# Altium PCB USBHub.PcbDoc
Units mm, origin at the board's own origin, x right, y up, seen from the top; angles counter-clockwise.
Board outline 68.78 x 107.13 mm, 2 copper layers (Top Layer, Bottom Layer), stack 1.071 mm thick; 66 components, 50 nets, 264 pads, 94 vias.
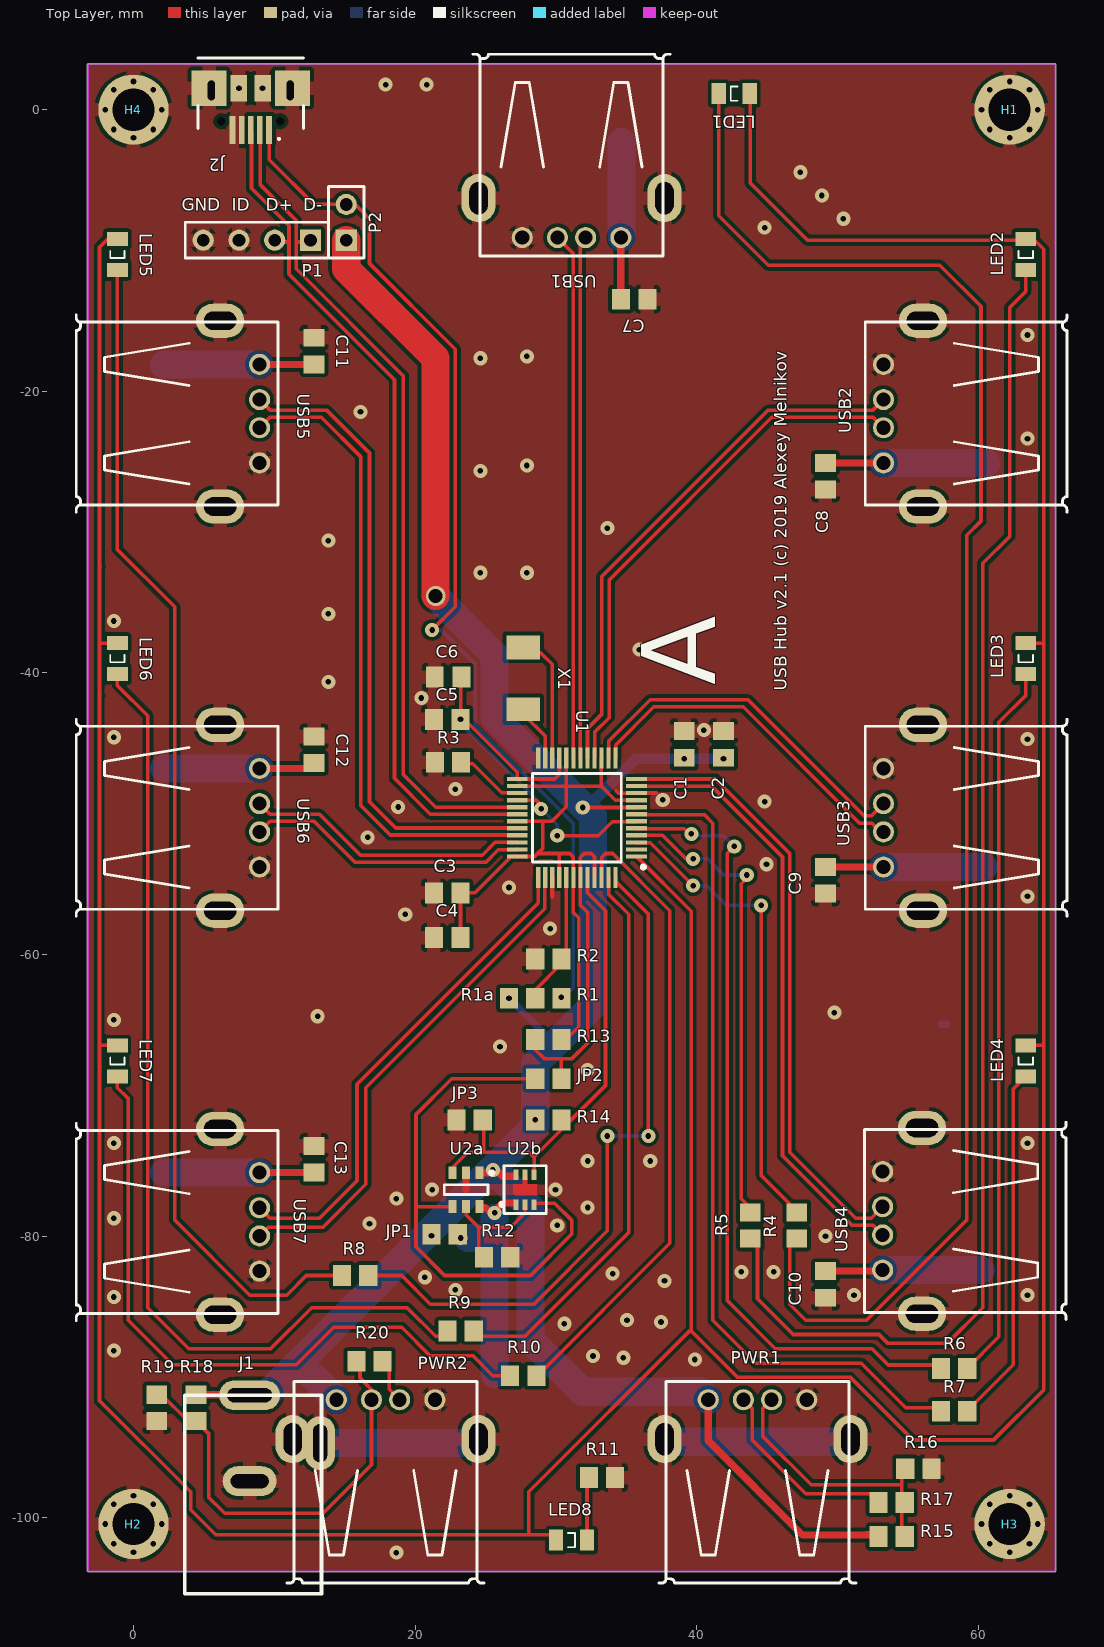
[diagram p0: Top Layer view]
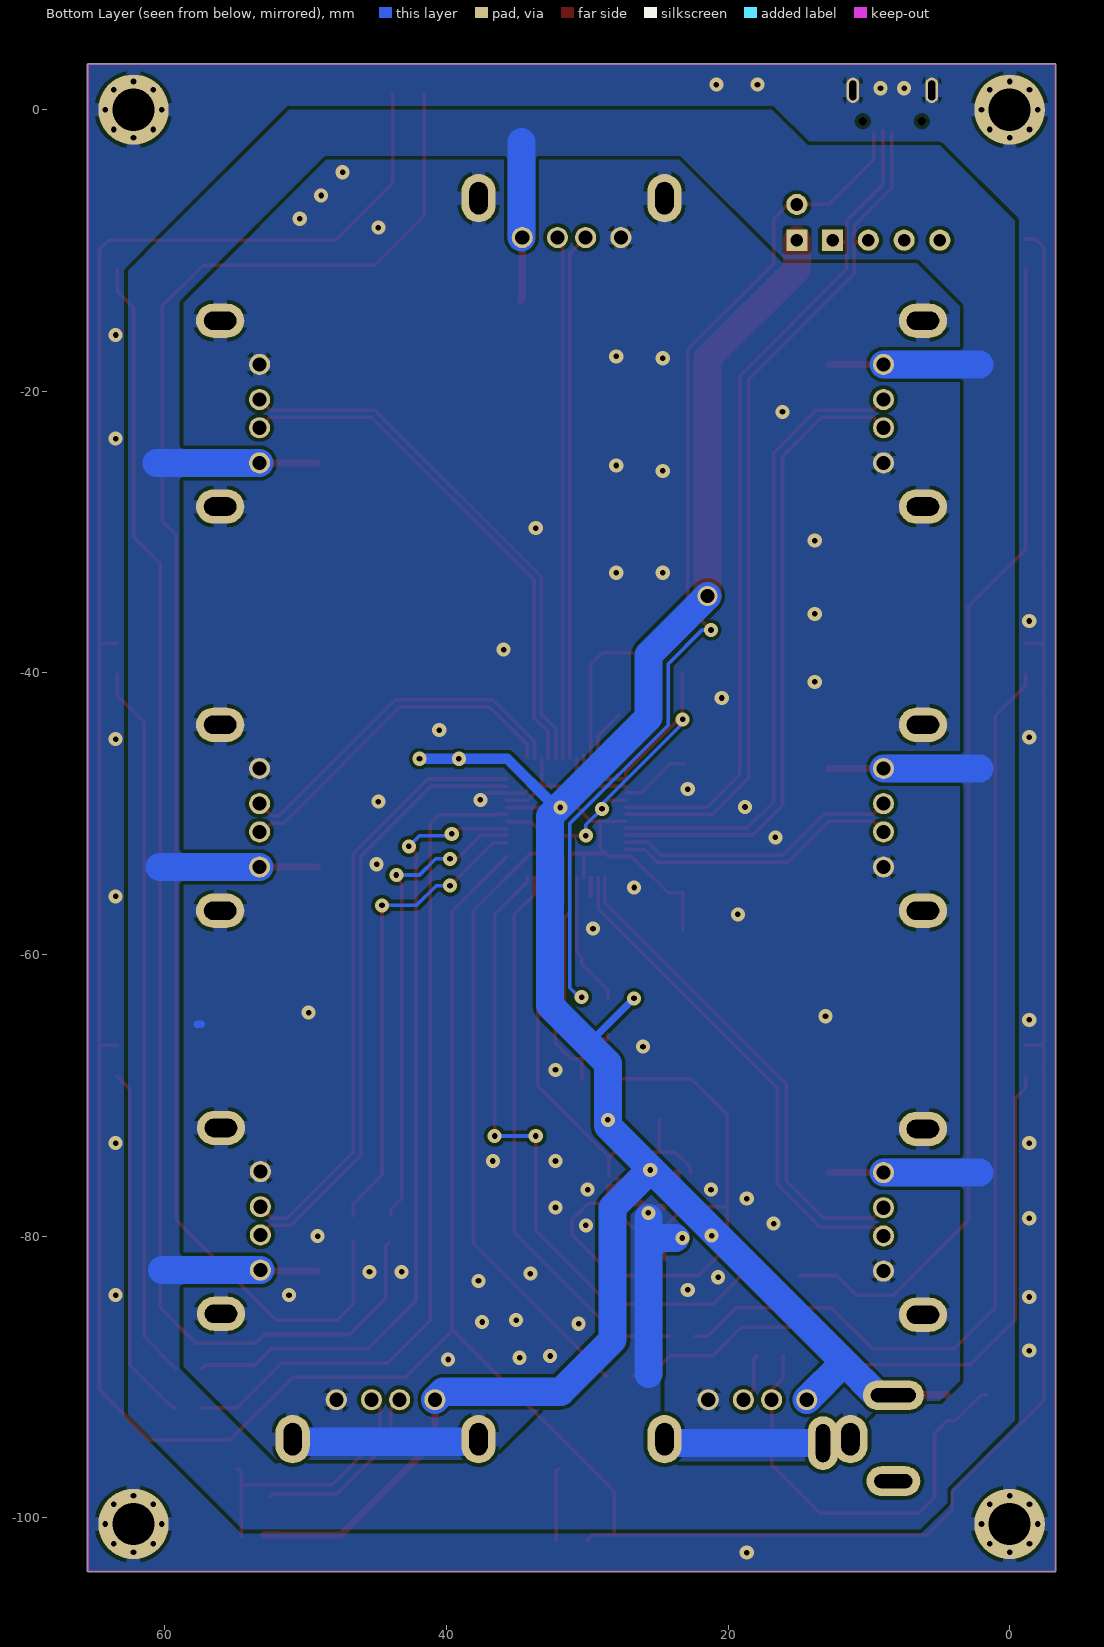
[diagram p1: Bottom Layer view, seen from below]
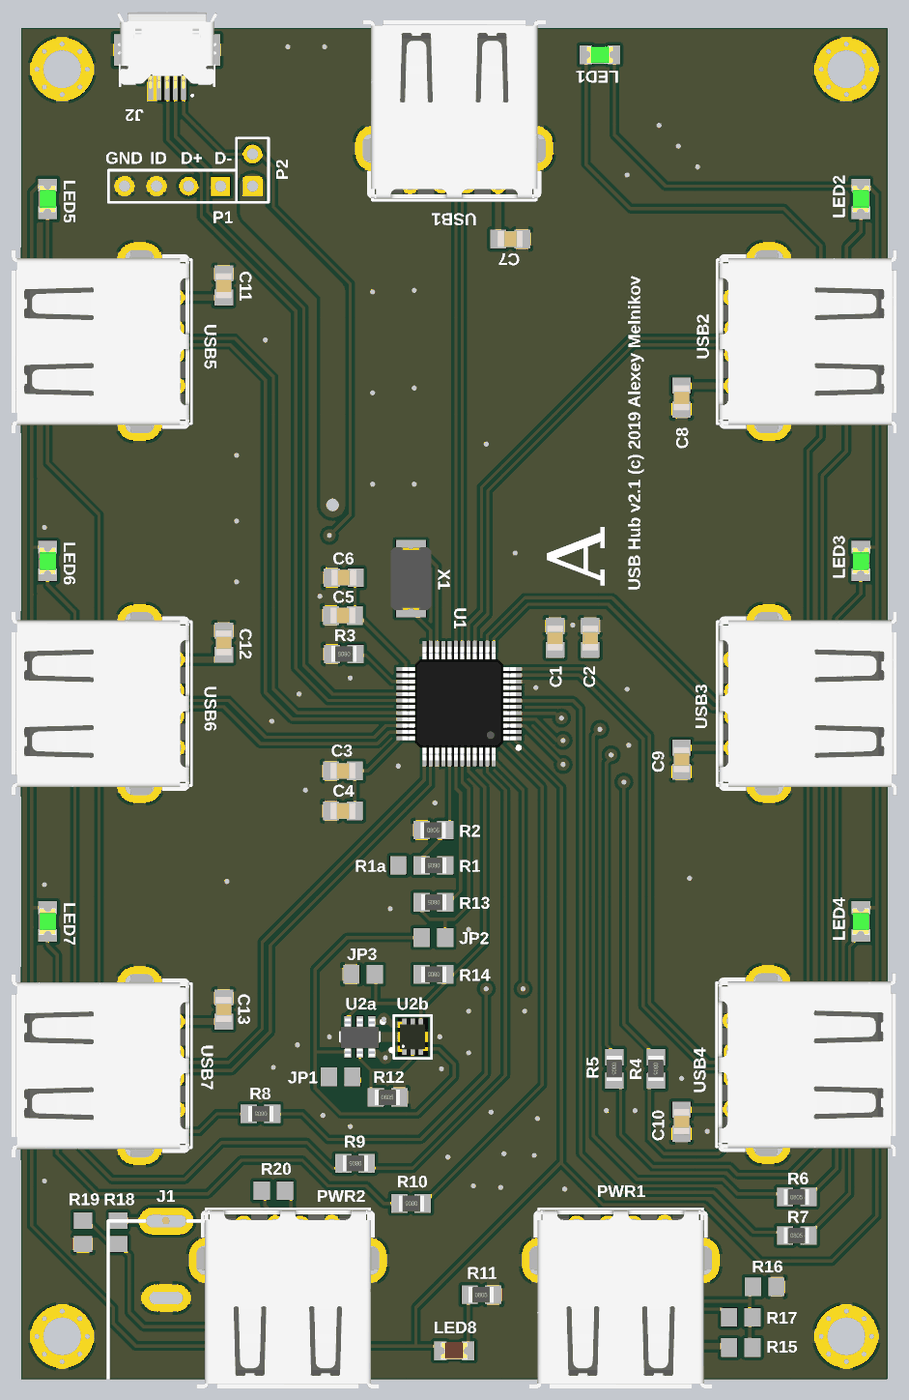
[diagram p2: 3D render of the assembled board from above, using the file's embedded part models]

## Layer stack, top to bottom
Top Solder: solder mask 0.0102, Solder Resist, Dk 3.5
Top Layer: signal copper 0.0356
Dielectric 1: dielectric 1, FR-4, Dk 4.8
Bottom Layer: signal copper 0.0356
Bottom Solder: solder mask 0.0102, Solder Resist, Dk 3.5

## Board outline
-3.275,-103.759 ccw(c-3.175,-103.759) -3.175,-103.859 65.405,-103.859 ccw(c65.405,-103.759) 65.505,-103.759 65.505,3.175 ccw(c65.405,3.175) 65.405,3.275 -3.175,3.275 ccw(c-3.175,3.175) -3.275,3.175

## Design rules (kind name [scope] priority, off if disabled: settings)
BoardOutlineClearance [All] p1: gap=0 ignorepadtopadclearanceinfootprint=FALSE
Clearance keep-out_clearance [InNamedPolygon('ground') vs OnLayer('Keep-Out Layer')] p1: gap=0 ignorepadtopadclearanceinfootprint=FALSE
Clearance [(InComponent('U1') OR InComponent('U2'))] p2: gap=0.2 ignorepadtopadclearanceinfootprint=TRUE except(0: Arc-Hole Track-Hole SMDPad-Hole THPad-Hole Via-Hole Fill-Hole Poly-Hole Region-Hole Text-Hole)
Clearance Clearance_1 [All] p3: gap=0.254 ignorepadtopadclearanceinfootprint=TRUE except(0: Arc-Hole Track-Hole SMDPad-Hole THPad-Hole Via-Hole Fill-Hole Poly-Hole Region-Hole Text-Hole; 0.1: Arc-Arc Arc-Track Arc-SMDPad Track-Track Track-SMDPad)
ComponentClearance [All] p1 off: gap=0.254 collisioncheckmode=3 verticalgap=0.254 showdistances=FALSE
Height [All] p1 off: minheight=0 maxheight=25.4 prefheight=12.7
HoleSize [All] p1: absolutevalues=TRUE maxlimit=6 minlimit=0.025 maxpercent=80.000 minpercent=20.000
MinimumSolderMaskSliver [InComponent('U*')] p1: minsoldermaskwidth=0.2
MinimumSolderMaskSliver MinimumSolderMaskSliver_1 [All] p2: minsoldermaskwidth=0.25
PolygonConnect PolygonConnect_1 [InNet('NetFB*')] p1: connectstyle=Direct reliefconductorwidth=0.762 reliefentries=4 polygonreliefangle="90 Angle" airgapwidth=0.254
PolygonConnect PolygonConnect_2 [IsVia] p2: connectstyle=Direct reliefconductorwidth=0.762 reliefentries=4 polygonreliefangle="90 Angle" airgapwidth=0.254
PolygonConnect [not IsVia] p3: connectstyle=Relief reliefconductorwidth=1 reliefentries=4 polygonreliefangle="90 Angle" airgapwidth=0.254
RoutingVias [All] p1: holewidth=0.4 width=1 viastyle="Through Hole" minholewidth=0.4 minwidth=0.9 maxholewidth=0.4 maxwidth=1
SilkToSolderMaskClearance [IsPad] p1 off: minsilkscreentomaskgap=0.127 clearancetoexposedcopper=TRUE
SolderMaskExpansion SolderMaskExpansion_U1 [InComponent('U1')] p1: expansion=0
SolderMaskExpansion [All] p2: expansion=0.051
Width Width_power [InNetClass('power')] p1: maxlimit=2 minlimit=0.254 preferedwidth=0.508 minimp=50.000000 maximp=50.000000 favimp=50.000000
Width Width_signal [All] p2: maxlimit=2 minlimit=0.254 preferedwidth=0.254 minimp=50.000000 maximp=50.000000 favimp=50.000000
25 further rules are at their usual default settings.

## Classes and differential pairs
net class power: GND VCC

## Components (designator, comment, footprint, x,y, rotation, side; value= is the part's Value field where it differs from the comment)
C1 "C0805" C0805 39.116,-45.085 r90 top value=10uF
C2 "C0805" C0805 41.91,-45.085 r90 top value=0.1uF
C3 "C0805" C0805 22.281,-55.626 r180 top value=10uF
C4 "C0805" C0805 22.281,-58.801 r180 top value=0.1uF
C5 "C0805" C0805 22.281,-43.307 r180 top value=0.1uF
C6 "C0805" C0805 22.346,-40.306 r180 top value=10uF
C7 "C0805" C0805 35.56,-13.462 r0 top value=10uF
C8 "C0805" C0805 49.149,-26.035 r270 top value=10uF
C9 "C0805" C0805 49.149,-54.737 r270 top value=10uF
C10 "C0805" C0805 49.149,-83.439 r270 top value=10uF
C11 "C0805" C0805 12.827,-17.145 r90 top value=10uF
C12 "C0805" C0805 12.827,-45.466 r90 top value=10uF
C13 "C0805" C0805 12.827,-74.549 r90 top value=10uF
H1 "M3" M3#1 62.23,0 r180 top locked
H2 "M3" M3#1 0,-100.457 r180 top locked
H3 "M3" M3#1 62.23,-100.457 r180 top locked
H4 "M3" M3#2 0,0 r270 top locked
J1 "*" "PWR-2mm - DNI" 8.255,-91.309 r0 top locked
J2 "MicroUSB SMT" "MicroUSB SMT v2" 8.33,3.674 r0 top locked
JP1 "0" "R0805 - DNI" 22.098,-79.883 r180 top
JP2 "0" "R0805 - DNI" 29.464,-68.834 r180 top
JP3 "0" "R0805 - DNI" 23.876,-71.755 r180 top
LED1 "Green" LEDG0805 42.672,1.143 r180 top
LED2 "Green" LEDG0805 63.373,-10.287 r270 top
LED3 "Green" LEDG0805 63.373,-38.989 r270 top
LED4 "Green" LEDG0805 63.373,-67.564 r270 top
LED5 "Green" LEDG0805 -1.143,-10.287 r270 top
LED6 "Green" LEDG0805 -1.143,-38.989 r270 top
LED7 "Green" LEDG0805 -1.143,-67.564 r270 top
LED8 "Red" LEDR0805 31.115,-101.6 r0 top
P1 "USB IN" HDR1X4 12.573,-9.271 r180 top
P2 "Header 2" HDR1X2 15.113,-9.271 r90 top
PWR1 "USBA-PTH" USB-A-F-PTH 44.323,-97.028 r0 top locked
PWR2 "USBA-PTH" USB-A-F-PTH 17.907,-97.028 r0 top locked
R1 "47K" R0805 29.464,-63.119 r180 top
R1a "47K" "R0805 - DNI" 27.604,-63.119 r0 top
R2 "100K" R0805 29.464,-60.325 r0 top
R3 "2.7K" R0805 22.346,-46.355 r180 top
R4 "510" R0805 47.117,-79.248 r270 top
R5 "510" R0805 43.815,-79.248 r270 top
R6 "510" R0805 58.293,-89.408 r0 top
R7 "510" R0805 58.293,-92.456 r0 top
R8 "510" R0805 15.748,-82.804 r180 top
R9 "510" R0805 23.241,-86.741 r180 top
R10 "510" R0805 27.686,-89.916 r180 top
R11 "510" R0805 33.274,-97.155 r0 top
R12 "5.6K" R0805 25.83,-81.5 r0 top
R13 "10K" R0805 29.464,-66.04 r180 top
R14 "10K" R0805 29.464,-71.755 r180 top
R15 "33K" "R0805 - DNI" 53.848,-101.346 r0 top
R16 "22K" "R0805 - DNI" 55.753,-96.52 r0 top
R17 "0" "R0805 - DNI" 53.848,-98.933 r0 top
R18 "33K" "R0805 - DNI" 4.445,-92.202 r270 top
R19 "22K" "R0805 - DNI" 1.651,-92.202 r270 top
R20 "0" "R0805 - DNI" 16.764,-88.9 r180 top
U1 "FE2.1" LQFP48 31.496,-50.292 r180 top
U2a "TSOP6" SOT23-6_L 23.622,-76.708 r270 top
U2b "uDFN6" "uDFN6 2x2mm" 27.813,-76.708 r90 top
USB1 "USBA-PTH" USB-A-F-PTH 31.115,-3.683 r180 top locked
USB2 "USBA-PTH" USB-A-F-PTH 58.674,-21.59 r90 top locked
USB3 "USBA-PTH" USB-A-F-PTH 58.674,-50.292 r90 top locked
USB4 "USBA-PTH" USB-A-F-PTH 58.613,-78.923 r90 top locked
USB5 "USBA-PTH" USB-A-F-PTH 3.556,-21.59 r270 top locked
USB6 "USBA-PTH" USB-A-F-PTH 3.556,-50.292 r270 top locked
USB7 "USBA-PTH" USB-A-F-PTH 3.556,-78.994 r270 top locked
X1 "12MHz" XTAL_G5032 27.686,-40.386 r90 top

## Footprints (in the part's own frame and the unit in brackets; to place one, negate y for a bottom-side part, rotate by r counter-clockwise, add the part's x,y. Pads: shape width x height; smd on the part's side, far side on the other; paste and mask are expansions set on the pad)
C0805 [mm] "Capacitor, Chip; 2.35 mm L X 1.35 mm W X 1.00 mm H body"
  rect 1.27x1.48 smd: 1(-0.945,0) 2(0.945,0)
  body extent -1,-0.62 1,0.63, height 0.58
HDR1X2 [mm] "Connector; Header; 2 Position"
  rect 1.5x1.5 hole 0.9: 1(0,0)
  round 1.5 hole 0.9: 2(2.54,0)
  silkscreen extent -1.27,-1.27 3.81,1.27
HDR1X4 [mm] "Connector; Header; 4 Position"
  rect 1.5x1.5 hole 0.9: 1(0,0)
  round 1.5 hole 0.9: 2(2.54,0) 3(5.08,0) 4(7.62,0)
  silkscreen extent -1.27,-1.27 8.89,1.27
LEDG0805 [mm] "LED, Chip; 2.35 mm L X 1.35 mm W X 1.00 mm H body"
  rect 1x1.48 smd: 1(-1.1,0) 2(1.1,0)
  Top Layer pour cut-out: -0.762,0.889 0.762,0.889 0.762,-0.889 -0.762,-0.889
  silkscreen extent -0.25,-0.51 0.25,0.51, body extent -1.05,-0.67 1.05,0.68, height 0.89
LEDR0805 [mm] "LED, Chip; 2.35 mm L X 1.35 mm W X 1.00 mm H body"
  rect 1x1.48 smd: 1(-1.1,0) 2(1.1,0)
  Top Layer pour cut-out: -0.762,0.889 0.762,0.889 0.762,-0.889 -0.762,-0.889
  silkscreen extent -0.25,-0.51 0.25,0.51, body extent -1.05,-0.67 1.05,0.68, height 0.89
LQFP48 [mm]
  rect 1.475x0.3 smd mask+0: 1(-4.238,2.75) 2(-4.238,2.25) 3(-4.238,1.75) 4(-4.238,1.25) 5(-4.238,0.75) 6(-4.238,0.25) 7(-4.238,-0.25) 8(-4.238,-0.75) 9(-4.238,-1.25) 10(-4.238,-1.75) 11(-4.238,-2.25) 12(-4.238,-2.75) 25(4.238,-2.75) 26(4.238,-2.25) 27(4.238,-1.75) 28(4.238,-1.25) 29(4.238,-0.75) 30(4.238,-0.25) 31(4.238,0.25) 32(4.238,0.75) 33(4.238,1.25) 34(4.238,1.75) 35(4.238,2.25) 36(4.238,2.75)
  rect 0.3x1.475 smd mask+0: 13(-2.75,-4.238) 14(-2.25,-4.238) 15(-1.75,-4.238) 16(-1.25,-4.238) 17(-0.75,-4.238) 18(-0.25,-4.238) 19(0.25,-4.238) 20(0.75,-4.238) 21(1.25,-4.238) 22(1.75,-4.238) 23(2.25,-4.238) 24(2.75,-4.238) 37(2.75,4.238) 38(2.25,4.238) 39(1.75,4.238) 40(1.25,4.238) 41(0.75,4.238) 42(0.25,4.238) 43(-0.25,4.238) 44(-0.75,4.238) 45(-1.25,4.238) 46(-1.75,4.238) 47(-2.25,4.238) 48(-2.75,4.238)
  silkscreen extent -4.85,-3.15 3.15,3.62, body extent -4.5,-4.5 4.5,4.5, height 1.5
M3#1 [mm] "Mounting Hole, Plated; 5.00 mm Pad, 3.00 mm Hole (with 8 vias)"
  round 0.6 hole 0.4 paste-0.6 mask-0.6: 1(-2,0) 1(-1.41,1.41) 1(-1.41,-1.41) 1(0,-2) 1(1.41,1.41) 1(1.41,-1.41) 1(2,0)
  round 0.6 hole 0.4 paste-0.4 mask-0.4: 1(0,2)
  round 5 hole 3: 1(0,0)
M3#2 [mm] "Mounting Hole, Plated; 5.00 mm Pad, 3.00 mm Hole (with 8 vias)"
  round 0.6 hole 0.4 paste-0.6 mask-0.6: 1(-2,0) 1(-1.41,1.41) 1(-1.41,-1.41) 1(0,2) 1(1.41,1.41) 1(1.41,-1.41) 1(2,0)
  round 5 hole 3: 1(0,0)
  round 0.6 hole 0.4 paste-0.4 mask-0.4: 1(0,-2)
"MicroUSB SMT v2" [mm]
  rect 0.4x2 smd: 1(1.3,-5.11) 2(0.65,-5.11) 3(0,-5.11) 4(-0.65,-5.11) 5(-1.3,-5.11)
  rect 2.5x2.5 smd: 5(-2.963,-2.15) 5(2.963,-2.15)
  oval 0.9x1.8 hole 0.5 slot 1.4 at 90 deg: 5(-2.8,-2.3) 5(2.8,-2.3)
  rect 1.175x1.9 smd: 5(-0.837,-2.15) 5(0.837,-2.15)
  round 0 hole 0.6 unplated mask+0: ""(-2.1,-4.5) ""(2.1,-4.5)
  silkscreen extent -3.75,-5.8 3.75,0, body extent -4,-5.2 4,0.84, height 2.65
"PWR-2mm - DNI" [mm] "Power Socket 2mm"
  oval 3.829x2.129 hole 1 slot 2.7 at 0 deg: 1(0,-6.1)
  oval 4.329x2.129 hole 1 slot 3.2 at 0 deg: 2(0,0)
  oval 2.129x3.829 hole 1 slot 2.7 at 90 deg: 3(5,-3.4)
  silkscreen extent -4.6,-14.1 5.1,0
R0805 [mm] "Resistor, Chip; 2.32 mm L X 1.25 mm W X 1.00 mm H body"
  rect 1.29x1.47 smd: 1(-0.93,0) 2(0.93,0)
  body extent -1.03,-0.62 0.97,0.63, height 0.42
"R0805 - DNI" [mm] "Resistor, Chip; 2.32 mm L X 1.25 mm W X 1.00 mm H body"
  rect 1.29x1.47 smd: 1(-0.93,0) 2(0.93,0)
SOT23-6_L [mm] "SOT23, 6-Leads, Body 2.9x1.6mm, Pitch 0.95mm, Lead Span 2.7mm, IPC High Density"
  rect 0.9x0.56 smd mask+0.051: 1(-1.2,0.95) 2(-1.2,0) 3(-1.2,-0.95) 4(1.2,-0.95) 5(1.2,0) 6(1.2,0.95)
  silkscreen extent -1.32,-1.55 0.35,1.95, body extent -1.44,-1.52 1.56,1.53, height 1.37
"uDFN6 2x2mm" [mm]
  rect 0.75x0.35 smd mask+0.051: 1(-1.06,0.65) 2(-1.06,0) 3(-1.06,-0.65) 4(1.06,-0.65) 5(1.06,0) 6(1.06,0.65)
  Top Layer region: 0.85,0.15 0.85,-0.15 0.1,-0.15 0.1,0.15
  Top Layer region: -0.4,0.7 -0.25,0.85 0.4,0.85 0.4,-0.85 -0.4,-0.85
  silkscreen extent -1.7,-1.5 1.7,1.77, body extent -1,-1 1,1, height 0.64
USB-A-F-PTH [mm] "USB-A-F-PTH"
  round 1.5 hole 1: D+(1,5.4) D-(-1,5.4) GND(3.5,5.4) VBUS(-3.5,5.4)
  oval 2.429x3.429 hole 1.3 slot 2.3 at 90 deg: GND(-6.6,2.6) GND(6.6,2.6)
  silkscreen extent -7,-7.62 7,6.7, body extent -7.9,-7.55 7.9,6.55, height 7.74
XTAL_G5032 [mm] "XTAL G5032"
  rect 1.7x2.4 smd: 1(-2.2,0) 2(2.2,0)
  body extent -2.5,-1.6 2.5,1.6, height 1.35

## Part data
C1 C2 C3 C4 C5 C6 C7 C8 C9 C10 C11 C12 C13: "Ceramic Chip Capacitor - Standard", PackageDocument=Mar-2001, Code_IPC=2012[0805], Code_JEITA=0805, ComponentLink1Description="Manufacturer Link", ComponentLink1URL=http://www.kemet.com/, ComponentLink2Description=Datasheet, ComponentLink2URL=http://www.kemet.com/kemet/web/homepage/kechome.nsf/vapubfilesname/F3102TA.pdf/$file/F3102TA.pdf, DatasheetDocument=Mar-2001, LatestRevisionDate=19-Mar-2004, LatestRevisionNote="Silkscreen size reduced.", Note="Footprint corresponds to dimensions for bulk cassette packaging. This case size has tightened tolerances.", PackageReference=0805, Published=17-Jul-2002, Publisher="Altium Limited"
J1: library part Powerjack
J2: "Micro USB B Receptacle Bottom Mount Assy Molex Right Angle SMT Type B Version 2.0 Micro USB Connector Socket, 30 V ac, 1A 47352 MICRO-USB", Manufacturer_Name=Molex, Manufacturer_Part_Number=47346-0001, Mouser Part Number=538-47346-0001, RS Part Number=7025475P, Allied_Number=70266948, Allied Price/Stock=https://www.alliedelec.com/molex-incorporated-47346-0001/70266948/, Datasheet Link=http://www.molex.com/pdm_docs/sd/473460001_sd.pdf, Mouser Price/Stock=https://www.mouser.com/Search/Refine.aspx?Keyword=538-47346-0001, RS Price/Stock=http://uk.rs-online.com/web/p/products/7025475P
JP1 JP2 JP3 R1 R1a R2 R3 R4 R5 R6 R7 R8 R9 R10 R11 R12 R13 R14 R15 R16 R17 R18 R19 R20: library part ERJ6RS, "Low Ohmic Value Thick Film Chip Resistor, 0.1 Ohm to 0.2 Ohm Range, 1%, 2% and 5% Tolerance, 0805 Size, 0.125 W", PackageDocument=Mar-2003, Code_IPC="2012 [0805]", ComponentLink1Description="Manufacturer Link", ComponentLink1URL=http://www.panasonic.com/industrial/components/resistive_products.htm, ComponentLink2Description=Datasheet, ComponentLink2URL=http://www.panasonic.com/industrial/components/pdf/AOA0000CE3.pdf, LatestRevisionDate=19-Mar-2004, LatestRevisionNote="Silkscreen size reduced.", PackageReference=6-0805, Published=17-Dec-2003, Publisher="Altium Limited"
LED1 LED2 LED3 LED4 LED5 LED6 LED7 LED8: library part LED2, "Typical RED, GREEN, YELLOW, AMBER GaAs LED", LatestRevisionDate=17-Jul-2002, LatestRevisionNote="Re-released for DXP Platform.", PackageDescription="SM LED; 2 Flat Leads", PackageReference=3.2X1.6X1.1, PackageVersion=Feb-2002, Published=8-Jun-2000, Publisher="Altium Limited"
P1: library part "Header 4", "Header, 4-Pin", LatestRevisionDate=17-Jul-2002, LatestRevisionNote="Re-released for DXP Platform.", Publisher="Altium Limited"
P2: "Header, 2-Pin", LatestRevisionDate=17-Jul-2002, LatestRevisionNote="Re-released for DXP Platform.", Publisher="Altium Limited"
U1: library part FE2.1_QFP, "USB 2.0 HIGH SPEED 7-PORT HUB CONTROLLER", Manufacturer_Name="Terminus Technology", Datasheet Link=http://www.35ic.net/ui/docs/assets/img/1458708200035.PDF, Geometry.Height=1.6mm, Manufacturer_Part_Number=FE2.1_QFP
U2a: library part NCP380-TSOP6, Manufacturer_Name=ON, Manufacturer_Part_Number=NCP380LSNAJAAT1G, Geometry.Height=1.45mm, Supplier_Name=RS
U2b: library part NCP380-uDFN, Manufacturer_Name=ON, Manufacturer_Part_Number=NCP380LMUAJAATBG, Geometry.Height=1.45mm, Supplier_Name=RS
X1: library part CRYSTALHC49UP, "PTH: ...   SMD: ...   Cylinder: CMR200T-32.768KDZBT"
PWR1 PWR2 USB1 USB2 USB3 USB4 USB5 USB6 USB7: USB=USB

## Via types
v1: diameter 1, hole 0.4, Top Layer to Bottom Layer, tented both sides, 93 vias
v2: diameter 1.4, hole 1, Top Layer to Bottom Layer, tented both sides, 1 vias

## Nets (pads, with @x,y where several pads share a name; then routed paths per layer and width w, separated by ;. In a path a pad name is that pad's centre, name@x,y a point inside that pad or via, vN(x,y) a via of type N, cw(c..) or ccw(c..) an arc to the next point about the centre after c; other vN are vias at no path point)
D+: J2.3 P1.2 U1.30 | length 60.9
  Top Layer w0.254: J2.3@8.382,-1.63 8.382,-5.588 11.049,-8.255 11.049,-9.398 ; P1.2 10.16,-9.398 11.049,-9.398 ; U1.30 21.086,-50.042 18.542,-47.498 18.542,-19.177 11.049,-11.684 11.049,-9.398
D-: J2.2 P1.1 U1.29 | length 59.9
  Top Layer w0.254: J2.2@8.993,-1.503 8.993,-5.31 11.557,-7.874 11.557,-11.303 19.177,-18.923 19.177,-47.244 21.475,-49.542 U1.29 ; 11.684,-9.398 12.446,-9.398 P1.1
GND: C1.2 C2.2 C3.2 C4.2 C5.2 C6.2 C7.2 C8.2 C9.2 C10.2 C11.2 C12.2 C13.2 H1.1 H2.1 H3.1 H4.1 J1.1 J1.3 J2.4 J2.5 JP3.2 P1.3 P1.4 PWR1.GND PWR2.GND R2.1 R3.2 R11.2 R12.2 R16.2 R19.2 U1.10 U1.24 U1.39 U2a.2 U2b.5 USB1.GND USB2.GND USB3.GND USB4.GND USB5.GND USB6.GND USB7.GND | length 31
  Top Layer w0.254: 34.29,-48.387 34.445,-48.542 U1.10
  Top Layer w0.3: 29.746,-55.908 U1.39 ; U1.10 37.112,-48.542
  Top Layer w0.508: v1@-1.524,-88.011 v1(-1.397,-88.138) ; v1@-1.524,-44.577 v1(-1.397,-44.577) ; 23.622,-76.708 U2a.2 ; v1@27.813,-25.273 v1(27.94,-25.273) ; v1@29.972,-79.248 v1(30.099,-79.248)
  Bottom Layer w0.508: PWR2.GND@24.226,-94.709 PWR2.GND@24.507,-94.428 ; v1@34.798,-85.979 v1(35.052,-85.979) ; 57.411,-64.956 57.726,-64.956
  Bottom Layer w2: J1.3 PWR2.GND@24.226,-94.709 ; PWR1.GND@37.719,-94.615 PWR1.GND@50.8,-94.615
  other v1: 18.669,-102.489 39.878,-88.773 34.798,-88.646 32.639,-88.519 30.607,-86.233 37.465,-86.106 -1.397,-84.328 51.181,-84.201 63.5,-84.201 22.86,-83.82 37.719,-83.185 20.701,-82.931 34.036,-82.677 43.18,-82.55 45.466,-82.55 49.149,-80.01 16.764,-79.121 -1.397,-78.74 32.258,-77.978 18.669,-77.343 21.209,-76.708 29.972,-76.708 32.258,-74.676 36.703,-74.676 -1.397,-73.406 63.5,-73.406 32.258,-68.199 26.035,-66.548 -1.397,-64.643 13.081,-64.389 49.784,-64.135 29.591,-58.166 19.304,-57.15 63.5,-55.88 26.67,-55.245 44.958,-53.594 16.637,-51.689 18.796,-49.53 44.831,-49.149 37.592,-49.022 22.86,-48.26 63.5,-44.704 40.513,-44.069 20.447,-41.783 13.843,-40.64 35.941,-38.354 -1.397,-36.322 13.843,-35.814 24.638,-32.893 27.94,-32.893 13.843,-30.607 33.655,-29.718 24.638,-25.654 63.5,-23.368 16.129,-21.463 24.638,-17.653 27.94,-17.526 63.5,-16.002 44.831,-8.382 50.419,-7.747 48.895,-6.096 47.371,-4.445 7.493,1.524 9.168,1.524 17.907,1.778 20.828,1.778
NetC3_1: C3.1 C4.1 R13.1 U1.9 U1.15 U1.20 U1.26 U1.31 U1.36 U1.40 U1.42 | length 48
  Top Layer w0.254: C4.1@23.226,-58.293 C3.1 24.257,-55.626 26.841,-53.042 U1.36 28.492,-53.042 28.702,-52.832 ; U1.31 29.083,-50.542 ; U1.26 30.746,-48.042 ; U1.40 30.246,-52.832 ; R13.1@30.606,-66.165 31.623,-65.148 31.623,-57.404 31.246,-57.027 U1.42 31.242,-54.526 31.242,-53.086 30.988,-52.832 30.246,-52.832 ; U1.20 30.746,-48.042 ; U1.15 33.223,-46.077 33.223,-48.042 ; U1.9 34.223,-49.042 33.223,-48.042 ; 28.702,-52.832 29.083,-52.451 29.083,-50.542 ; 28.702,-52.832 30.246,-52.832 ; 29.083,-50.542 29.722,-50.542 30.746,-49.518 30.746,-48.042 ; 30.746,-48.042 33.223,-48.042
NetC5_1: C5.1 C6.1 U1.6 U1.21 U1.25 U1.28 | length 34.2
  Top Layer w0.254: C5.1@23.099,-43.18 v1(23.226,-43.307) ; C5.1@23.106,-43.426 v1(23.226,-43.307) ; C5.1@23.226,-43.546 v1(23.226,-43.307) ; C6.1@23.241,-40.052 C5.1@23.241,-43.307 ; U1.28 28.595,-49.042 29.039,-49.486 28.956,-49.57 v1(28.956,-49.657) ; v1(30.099,-51.562) 33.02,-51.562 34.017,-50.565 35.711,-50.565 U1.6 ; U1.21@30.246,-45.8 U1.21 30.246,-47.224 29.928,-47.542 U1.25 27.258,-47.07 23.495,-43.307 C5.1@23.241,-43.307 ; v1(23.226,-43.307) C5.1@23.241,-43.307
  Bottom Layer w0.254: v1(23.226,-43.307) 23.226,-43.576 28.972,-49.322 v1@28.972,-49.514 ; v1@29.146,-49.339 v1@28.972,-49.514 ; v1(30.099,-51.562) 30.099,-50.8 v1(28.956,-49.657) ; v1(28.956,-49.657) v1@28.956,-49.53 ; v1(28.956,-49.657) 28.892,-49.593 v1@28.956,-49.53 ; v1@28.956,-49.53 v1@28.972,-49.514
NetJ2_1: J2.1 P2.2 R1.1 | length 74.4
  Top Layer w0.254: J2.1@9.643,-1.63 9.643,-3.547 12.827,-6.731 P2.2 15.748,-6.731 16.764,-7.747 16.764,-10.922 22.86,-17.018 22.86,-35.306 v1(21.209,-36.957) ; R1.1 v1(30.394,-63.033) R1.1@30.394,-62.906
  Bottom Layer w0.254: v1(21.209,-36.957) 21.844,-36.957 24.257,-39.37 24.257,-43.712 31.242,-50.697 31.242,-62.357 30.693,-62.906 v1@30.394,-62.906
NetJP2_1: JP2.1 R13.2 U1.43 U1.45 | length 24
  Top Layer w0.254: R13.2@28.534,-65.659 R13.2 29.038,-66.04 28.426,-66.653 29.169,-67.396 30.394,-67.396 ; JP2.1@30.276,-68.698 JP2.1@30.394,-68.698 ; JP2.1 JP2.1@30.394,-68.698 ; U1.45 32.746,-53.066 32.512,-52.832 32.004,-52.832 31.746,-53.09 U1.43 31.746,-56.511 32.258,-57.023 32.258,-66.291 31.153,-67.396 30.394,-67.396 ; JP2.1@30.394,-68.698 30.394,-67.396
NetJP2_2: JP2.2 U2a.4 U2b.3 | length 38.6
  Top Layer w0.254: 20.066,-77.978 20.066,-80.772 22.098,-82.804 28.194,-82.804 31.115,-79.883 31.115,-78.867 29.911,-77.663 U2b.3@28.463,-77.663 ; U2a.4 20.066,-77.908 20.066,-71.374 22.606,-68.834 28.068,-68.834 JP2.2@28.32,-69.086
NetJP3_1: JP3.1 R14.1 U1.44 U2a.3 U2b.4 | length 32.9
  Top Layer w0.254: U2a.3 22.672,-75.118 23.749,-74.041 24.892,-74.041 ; JP3.1 24.892,-71.841 24.892,-74.041 ; U2b.4@28.463,-75.753 U2b.4 28.463,-74.437 28.433,-74.407 ; U1.44 32.246,-55.614 33.528,-56.896 33.528,-69.312 28.433,-74.407 ; 24.892,-74.041 28.067,-74.041 28.433,-74.407
NetLED1_1: LED1.1 LED2.1 LED3.1 LED4.1 LED5.1 LED6.1 LED7.1 LED8.1 U1.1 | length 320.5
  Top Layer w0.254: -2.413,-88.308 -2.413,-91.694 4.064,-98.171 4.064,-99.441 5.842,-101.219 28.067,-101.219 ; -2.413,-88.224 -2.413,-67.945 ; -2.37,-67.988 -2.413,-67.945 ; -2.37,-41.613 -2.413,-41.656 ; -2.37,-32.469 -2.413,-32.512 ; LED7.1 -2.37,-66.464 -2.413,-66.421 ; LED6.1 -2.37,-37.889 -2.413,-37.846 ; LED5.1 -1.821,-9.187 -2.413,-9.779 -2.413,-32.512 ; LED8.1 29.634,-101.219 28.067,-101.219 ; U1.1 39.624,-56.932 39.624,-86.741 ; LED1.1@43.815,1.143 43.815,-5.207 47.879,-9.271 64.008,-9.271 64.643,-9.906 64.643,-37.973 ; LED4.1 64.6,-66.464 64.643,-66.421 ; LED3.1 64.559,-37.889 64.643,-37.973 ; -2.413,-67.945 -2.413,-66.421 ; -2.413,-66.421 -2.413,-41.656 ; -2.413,-41.656 -2.413,-37.846 ; -2.413,-37.846 -2.413,-32.512 ; 28.067,-101.219 28.067,-98.171 39.497,-86.741 39.624,-86.741 ; 39.624,-86.741 42.926,-90.043 50.927,-90.043 55.372,-94.488 61.087,-94.488 64.643,-90.932 64.643,-66.421 ; 64.643,-66.421 64.643,-37.973
NetLED1_2: LED1.2 R4.2 | length 115.7
  Top Layer w0.254: LED1.2 41.572,-7.536 45.085,-11.049 57.277,-11.049 60.198,-13.97 60.198,-29.21 59.182,-30.226 59.182,-78.867 52.07,-85.979 47.752,-85.979 46.609,-84.836 R4.2@46.609,-80.432
NetLED2_2: LED2.2 R5.2 | length 97.5
  Top Layer w0.254: R5.2@44.069,-80.432 44.323,-80.686 44.323,-84.455 46.863,-86.995 52.959,-86.995 53.594,-87.63 57.785,-87.63 60.325,-85.09 60.325,-32.217 62.23,-30.312 62.23,-14.054 63.373,-12.911 LED2.2
NetLED3_2: LED3.2 R6.2 | length 51
  Top Layer w0.254: R6.2 61.468,-87.163 61.468,-43.518 63.373,-41.613 LED3.2
NetLED4_2: LED4.2 R7.2 | length 25.4
  Top Layer w0.254: R7.2@59.223,-92.202 59.436,-92.202 62.484,-89.154 62.484,-69.553 LED4.2
NetLED5_2: LED5.2 R8.2 | length 84
  Top Layer w0.254: LED5.2 -1.143,-31.242 2.921,-35.306 2.921,-78.867 8.255,-84.201 10.881,-84.201 12.278,-82.804 R8.2 R8.2@14.929,-82.804
NetLED6_2: LED6.2 R9.2 | length 70.5
  Top Layer w0.254: LED6.2 -1.143,-40.894 1.016,-43.053 1.016,-85.09 3.937,-88.011 9.738,-88.011 12.659,-85.09 19.431,-85.09 21.463,-87.122 R9.2@22.311,-87.122
NetLED7_2: LED7.2 R10.2 | length 48.6
  Top Layer w0.254: LED7.2 -1.143,-69.469 -0.381,-70.231 -0.381,-85.979 2.794,-89.154 11.557,-89.154 14.224,-86.487 19.05,-86.487 21.082,-88.519 24.13,-88.519 25.527,-89.916 R10.2
NetLED8_2: LED8.2 R11.1 | length 5.2
  Top Layer w0.254: R11.1@32.045,-96.52 32.215,-96.69 LED8.2
NetPWR1_D+: PWR1.D+ R15.2 R16.1 R17.2 | length 19.1
  Top Layer w0.254: PWR1.D+ 44.704,-92.247 44.704,-94.234 48.133,-97.663 54.569,-97.663 ; R15.2@54.569,-101.346 54.569,-97.663 ; R16.1 54.569,-96.774 54.569,-97.663
NetPWR1_D-: PWR1.D- R17.1 | length 13.4
  Top Layer w0.254: PWR1.D- 43.942,-92.247 43.942,-94.488 47.752,-98.298 52.283,-98.298 R17.1@52.537,-98.552
NetPWR2_D+: PWR2.D+ R20.1 | length 3.5
  Top Layer w0.254: R20.1@17.948,-88.519 18.161,-88.732 18.161,-90.882 PWR2.D+
NetPWR2_D-: PWR2.D- R18.2 R19.1 R20.2 | length 31.2
  Top Layer w0.254: R19.1 1.991,-91.272 3.851,-93.132 R18.2 5.334,-94.021 5.334,-98.552 6.477,-99.695 13.462,-99.695 16.907,-96.25 PWR2.D- 17.272,-91.263 16.088,-90.079 R20.2@16.088,-88.519
NetR1_2: R1.2 R1a.2 R2.2 U1.41 | length 9.4
  Top Layer w0.254: R1a.2 R1a.2@28.534,-62.652 ; R1a.2@28.534,-62.525 30.394,-60.665 R2.2 30.394,-60.198 30.746,-59.846 U1.41
NetR3_1: R3.1 U1.27 | length 5
  Top Layer w0.254: R3.1@23.155,-46.45 24.098,-46.45 26.167,-48.519 27.235,-48.519 U1.27
NetR4_1: R4.1 U1.3 | length 34.2
  Top Layer w0.254: U1.3@35.711,-52.065 U1.3 35.757,-52.065 36.698,-52.065 v1(39.751,-55.118) ; v1(44.577,-56.515) 44.577,-75.692 46.609,-77.724 R4.1@46.609,-78.572
  Bottom Layer w0.254: v1(39.751,-55.118) 39.751,-54.737 40.132,-55.118 40.726,-55.118 42.123,-56.515 v1(44.577,-56.515)
NetR5_1: R5.1 U1.4 | length 33.6
  Top Layer w0.254: U1.4@35.711,-51.565 U1.4 37.572,-51.542 39.243,-53.213 v1(39.751,-53.213) ; v1(43.561,-54.356) 43.561,-54.61 43.18,-54.991 43.18,-77.343 43.961,-78.124 R5.1@43.961,-78.464
  Bottom Layer w0.254: v1(39.751,-53.213) 40.767,-53.213 41.91,-54.356 v1(43.561,-54.356)
NetR6_1: R6.1 U1.5 | length 57.1
  Top Layer w0.254: U1.5 35.757,-51.065 39.127,-51.065 v1@39.624,-51.562 ; v1(42.672,-52.324) 42.164,-52.832 42.164,-84.582 45.593,-88.011 52.451,-88.011 53.601,-89.161 57.116,-89.161 R6.1
  Bottom Layer w0.254: v1@39.624,-51.562 41.91,-51.562 v1(42.672,-52.324)
  other v1: 39.624,-51.435
NetR7_1: R7.1 U1.7 | length 59.8
  Top Layer w0.254: U1.7 36.453,-50.042 36.476,-50.065 40.54,-50.065 41.148,-50.673 41.148,-85.979 44.196,-89.027 51.689,-89.027 54.864,-92.202 R7.1@57.363,-92.202
NetR8_1: R8.1 U1.48 | length 49.3
  Top Layer w0.254: R8.1 19.05,-82.804 21.082,-84.836 28.448,-84.836 33.655,-79.629 33.655,-73.111 33.868,-72.898 v1(33.655,-72.898) ; U1.48 34.246,-54.82 36.576,-57.15 v1(36.576,-72.898)
  Bottom Layer w0.254: v1(33.655,-72.898) v1(36.576,-72.898)
NetR9_1: R9.1 U1.47 | length 39.9
  Top Layer w0.254: R9.1@24.171,-87.122 27.813,-87.122 35.179,-79.756 35.179,-57.15 33.746,-55.717 U1.47
NetR10_1: R10.1 U1.46 | length 45.1
  Top Layer w0.254: R10.1 28.702,-89.916 38.1,-80.518 38.1,-56.896 34.036,-52.832 33.528,-52.832 33.269,-53.091 33.269,-54.507 U1.46
NetR12_1: R12.1 U2a.5 U2b.2 | length 8.5
  Top Layer w0.254: U2a.5 23.622,-78.486 24.511,-79.375 ; R12.1@24.511,-81.661 24.511,-79.375 ; U2b.2@27.813,-77.663 U2b.2 27.813,-78.359 26.797,-79.375 24.511,-79.375
NetU1_11: U1.11 USB4.D- | length 43.2
  Top Layer w0.254: U1.11 41.057,-48.042 46.101,-53.086 46.101,-74.295 51.054,-79.248 52.538,-79.248 USB4.D-
  Bottom Layer w0.254: USB4.D-@53.253,-79.502 USB4.D-@53.34,-79.415
NetU1_12: U1.12 USB4.D+ | length 43.2
  Top Layer w0.254: U1.12 41.319,-47.542 46.609,-52.832 46.609,-74.041 51.308,-78.74 52.396,-78.74 USB4.D+
NetU1_13: U1.13 USB3.D- | length 24.8
  Top Layer w0.254: U1.13 34.246,-45.129 36.957,-42.418 43.307,-42.418 51.562,-50.673 52.451,-50.673 53.07,-51.292 USB3.D-
NetU1_14: U1.14 USB3.D+ | length 25.7
  Top Layer w0.254: U1.14 33.746,-44.867 36.703,-41.91 43.647,-41.91 51.902,-50.165 52.401,-50.165 USB3.D+
NetU1_16: U1.16 USB2.D- | length 37.7
  Top Layer w0.254: U1.16@32.766,-46.054 32.766,-44.196 33.782,-43.18 33.782,-33.401 45.339,-21.844 52.528,-21.844 USB2.D-
NetU1_17: U1.17 USB2.D+ | length 38.5
  Top Layer w0.254: U1.17 32.246,-43.954 33.274,-42.926 33.274,-33.147 45.085,-21.336 52.528,-21.336 USB2.D+
NetU1_18: U1.18 USB1.D- | length 37.1
  Top Layer w0.254: U1.18 31.746,-9.452 USB1.D-
NetU1_19: U1.19 USB1.D+ | length 37.4
  Top Layer w0.254: USB1.D+ 31.246,-10.214 U1.19
NetU1_22: U1.22 X1.2 | length 9.9
  Top Layer w0.254: X1.2@26.797,-38.567 28.915,-38.567 29.746,-39.398 U1.22
NetU1_23: U1.23 X1.1 | length 3.7
  Top Layer w0.254: X1.1@27.727,-42.967 29.246,-44.486 U1.23 U1.23@29.269,-46.054
NetU1_32: U1.32 USB5.D- | length 45.4
  Top Layer w0.254: USB5.D- 9.702,-21.336 13.716,-21.336 16.764,-24.384 16.764,-49.149 18.634,-51.019 27.235,-51.019 U1.32
NetU1_33: U1.33 USB5.D+ | length 45.4
  Top Layer w0.254: USB5.D+ 9.702,-21.844 13.335,-21.844 16.129,-24.638 16.129,-49.403 18.245,-51.519 27.235,-51.519 U1.33
NetU1_34: U1.34 USB6.D- | length 20.2
  Top Layer w0.254: USB6.D- 9.702,-50.038 13.208,-50.038 16.129,-52.959 24.765,-52.959 25.682,-52.042 U1.34
NetU1_35: U1.35 USB6.D+ | length 20.2
  Top Layer w0.254: USB6.D+ 9.702,-50.546 12.827,-50.546 15.748,-53.467 25.019,-53.467 25.921,-52.565 27.235,-52.565 U1.35
NetU1_37: U1.37 USB7.D- | length 35.2
  Top Layer w0.254: USB7.D- 9.702,-78.74 13.208,-78.74 15.875,-76.073 15.875,-69.215 28.746,-56.344 U1.37
NetU1_38: U1.38 USB7.D+ | length 36.1
  Top Layer w0.254: USB7.D+ 9.575,-79.375 13.462,-79.375 16.51,-76.327 16.51,-69.469 29.223,-56.756 29.223,-54.553 U1.38
VBUS: C7.1 C8.1 C9.1 C10.1 C11.1 C12.1 C13.1 JP1.1 U2a.6 U2b.1 USB1.VBUS USB2.VBUS USB3.VBUS USB4.VBUS USB5.VBUS USB6.VBUS USB7.VBUS | length 93
  Top Layer w0.254: JP1.1@23.028,-80.137 JP1.1@23.114,-80.137
  Top Layer w0.5: U2a.6@24.637,-77.976 25.017,-77.976 25.4,-78.359 v1(25.654,-78.359) 25.978,-77.908 26.223,-77.663 26.985,-77.663
  Top Layer w0.508: USB7.VBUS C13.1 ; USB6.VBUS C12.1@12.827,-46.792 ; USB5.VBUS C11.1 ; USB1.VBUS C7.1 C7.1@34.742,-13.589 ; C10.1 53.142,-82.494 USB4.VBUS ; C9.1 USB3.VBUS ; C8.1 USB2.VBUS
  Bottom Layer w2: 2.159,-75.494 USB7.VBUS ; 2.159,-46.792 USB6.VBUS ; 2.159,-18.09 USB5.VBUS ; 23.749,-80.137 25.654,-80.137 ; 25.654,-89.789 25.654,-80.137 ; v1@25.654,-78.74 25.654,-80.137 ; USB1.VBUS@34.671,-9.083 34.671,-2.286 ; USB4.VBUS 60.198,-82.423 ; USB3.VBUS 60.381,-53.792 ; USB2.VBUS 60.579,-25.09
  other v1: 23.241,-80.137
VCC: C1.1 C2.1 J1.2 JP1.2 P2.1 PWR1.VBUS PWR2.VBUS R1a.1 R14.2 R15.1 R18.1 U1.8 U2a.1 U2b.6 | length 175.2
  Top Layer w0.254: v1(31.912,-49.565) 35.711,-49.565 U1.8
  Top Layer w0.508: R18.1 8.218,-91.272 J1.2 ; JP1.2@21.168,-80.137 v1(21.168,-79.969) ; U2a.1 25.978,-75.508 26.223,-75.753 U2b.6@26.99,-75.753 ; PWR1.VBUS 40.823,-94.544 47.508,-101.229 52.019,-101.229 52.029,-101.219 R15.1@52.959,-101.219
  Top Layer w2: P2.1 15.113,-11.303 21.463,-17.653 v2(21.463,-34.544)
  Bottom Layer w0.508: 11.684,-89.027 11.806,-89.027 ; v1@21.082,-79.883 v1(21.168,-79.969) ; v1(26.674,-63.119) 29.851,-66.296 29.851,-66.421 ; 32.598,-61.001 32.639,-60.96
  Bottom Layer w0.762: 32.431,-49.357 35.687,-46.101 v1(39.116,-46.101) v1(41.91,-46.101)
  Bottom Layer w2: J1.2 9.402,-91.309 11.684,-89.027 28.534,-72.177 v1(28.534,-71.755) 28.534,-67.738 29.851,-66.421 32.639,-63.633 32.639,-60.96 32.639,-50.165 25.654,-43.18 25.654,-38.735 v2(21.463,-34.544) ; 11.806,-89.027 PWR2.VBUS ; v1(25.527,-75.311) 28.194,-77.978 28.194,-87.376 31.877,-91.059 40.254,-91.059 PWR1.VBUS
pads on no net: J2. U1.2

## Polygon pours and split planes (outlines as drawn)
GND on Bottom Layer "ground" (solid, remove dead copper, pour order 2): -3.275,-103.759 ccw(c-3.175,-103.759) -3.175,-103.859 65.405,-103.859 ccw(c65.405,-103.759) 65.505,-103.759 65.505,3.175 ccw(c65.405,3.175) 65.405,3.275 -3.175,3.275 ccw(c-3.175,3.175) -3.275,3.175
VBUS on Bottom Layer "power" (solid, remove dead copper, pour order 1): 4.445,-97.917 4.445,-98.933 6.35,-100.838 7.366,-100.838 54.483,-100.838 62.611,-92.71 62.611,-11.43 60.071,-8.89 51.181,0 16.891,0 14.351,-2.54 4.953,-2.54 -0.381,-7.874 -0.381,-93.091
GND on Bottom Layer "ground" (solid, remove dead copper, pour order 0): 8.89,-91.694 13.208,-96.012 24.507,-96.012 24.507,-87.888 25.654,-86.741 27.813,-86.741 29.781,-88.71 36.957,-95.885 52.07,-95.885 58.674,-89.281 58.674,-62.103 58.674,-31.242 58.674,-13.716 57.911,-12.953 48.514,-3.556 23.495,-3.556 16.129,-10.922 6.604,-10.922 3.556,-13.97 3.556,-90.297 4.953,-91.694
GND on Top Layer "ground" (solid, remove dead copper, pour order 4): -3.275,-103.759 ccw(c-3.175,-103.759) -3.175,-103.859 65.405,-103.859 ccw(c65.405,-103.759) 65.505,-103.759 65.505,3.175 ccw(c65.405,3.175) 65.405,3.275 -3.175,3.275 ccw(c-3.175,3.175) -3.275,3.175

## Keep-outs
Keep-Out Layer:
  lines w0.1: -3.225,-103.759 ccw(c-3.175,-103.759) -3.175,-103.809 ; -3.225,-103.759 ccw(c-3.175,-103.759) -3.175,-103.809 ; -3.225,-103.759 -3.225,3.175 ; -3.225,3.175 cw(c-3.175,3.175) -3.175,3.225 ; -3.225,3.175 cw(c-3.175,3.175) -3.175,3.225 ; -3.175,-103.809 65.405,-103.809 ; -3.175,3.225 65.405,3.225 ; 65.405,-103.809 ccw(c65.405,-103.759) 65.455,-103.759 ; 65.405,-103.809 ccw(c65.405,-103.759) 65.455,-103.759 ; 65.405,3.225 cw(c65.405,3.175) 65.455,3.175 ; 65.405,3.225 cw(c65.405,3.175) 65.455,3.175 ; 65.455,-103.759 65.455,3.175

## Other copper
Top Layer:
  pour cut-out: 26.223,-76.327 27.178,-76.327 27.178,-77.089 26.223,-77.089 26.223,-78.359 29.21,-78.359 29.21,-77.108 28.663,-77.108 28.663,-76.308 29.21,-76.308 29.21,-75.057 26.223,-75.057
  pour cut-out: 22.225,-76.327 26.223,-76.327 26.223,-74.898 22.225,-74.898
  pour cut-out: 22.225,-78.549 26.223,-78.549 26.223,-77.089 22.225,-77.089

## Silkscreen, mask and mechanical layers (free items; w line width, h text height)
Top Overlay:
  text "GND" at 3.429,-7.493 h1.52
  text "ID" at 6.985,-7.493 h1.52
  text "D+" at 9.398,-7.493 h1.52
  text "D-" at 12.065,-7.493 h1.52
  text "A" at 43.053,-40.894 h9 r90
  text "USB Hub v2.1 (c) 2019 Alexey Melnikov" at 46.736,-41.275 h1.52 r90

## Text inside footprints (layer, text, board x,y; h text height)
J1: Mechanical 18 "AMP 787616-1" at 11.215,-103.431 h0.86 r180
PWR1: Mechanical 18 "AMP 787616-1" at 48.883,-103.15 h0.86 r180
PWR2: Mechanical 18 "AMP 787616-1" at 22.467,-103.15 h0.86 r180
USB1: Mechanical 18 "AMP 787616-1" at 26.555,2.439 h0.86
USB2: Mechanical 18 "AMP 787616-1" at 64.796,-17.03 h0.86 r270
USB3: Mechanical 18 "AMP 787616-1" at 64.796,-45.732 h0.86 r270
USB4: Mechanical 18 "AMP 787616-1" at 64.735,-74.363 h0.86 r270
USB5: Mechanical 18 "AMP 787616-1" at -2.566,-26.15 h0.86 r90
USB6: Mechanical 18 "AMP 787616-1" at -2.566,-54.852 h0.86 r90
USB7: Mechanical 18 "AMP 787616-1" at -2.566,-83.554 h0.86 r90